# EAGLE board fri3d_badge_2016 (EAGLE 7.5.0)
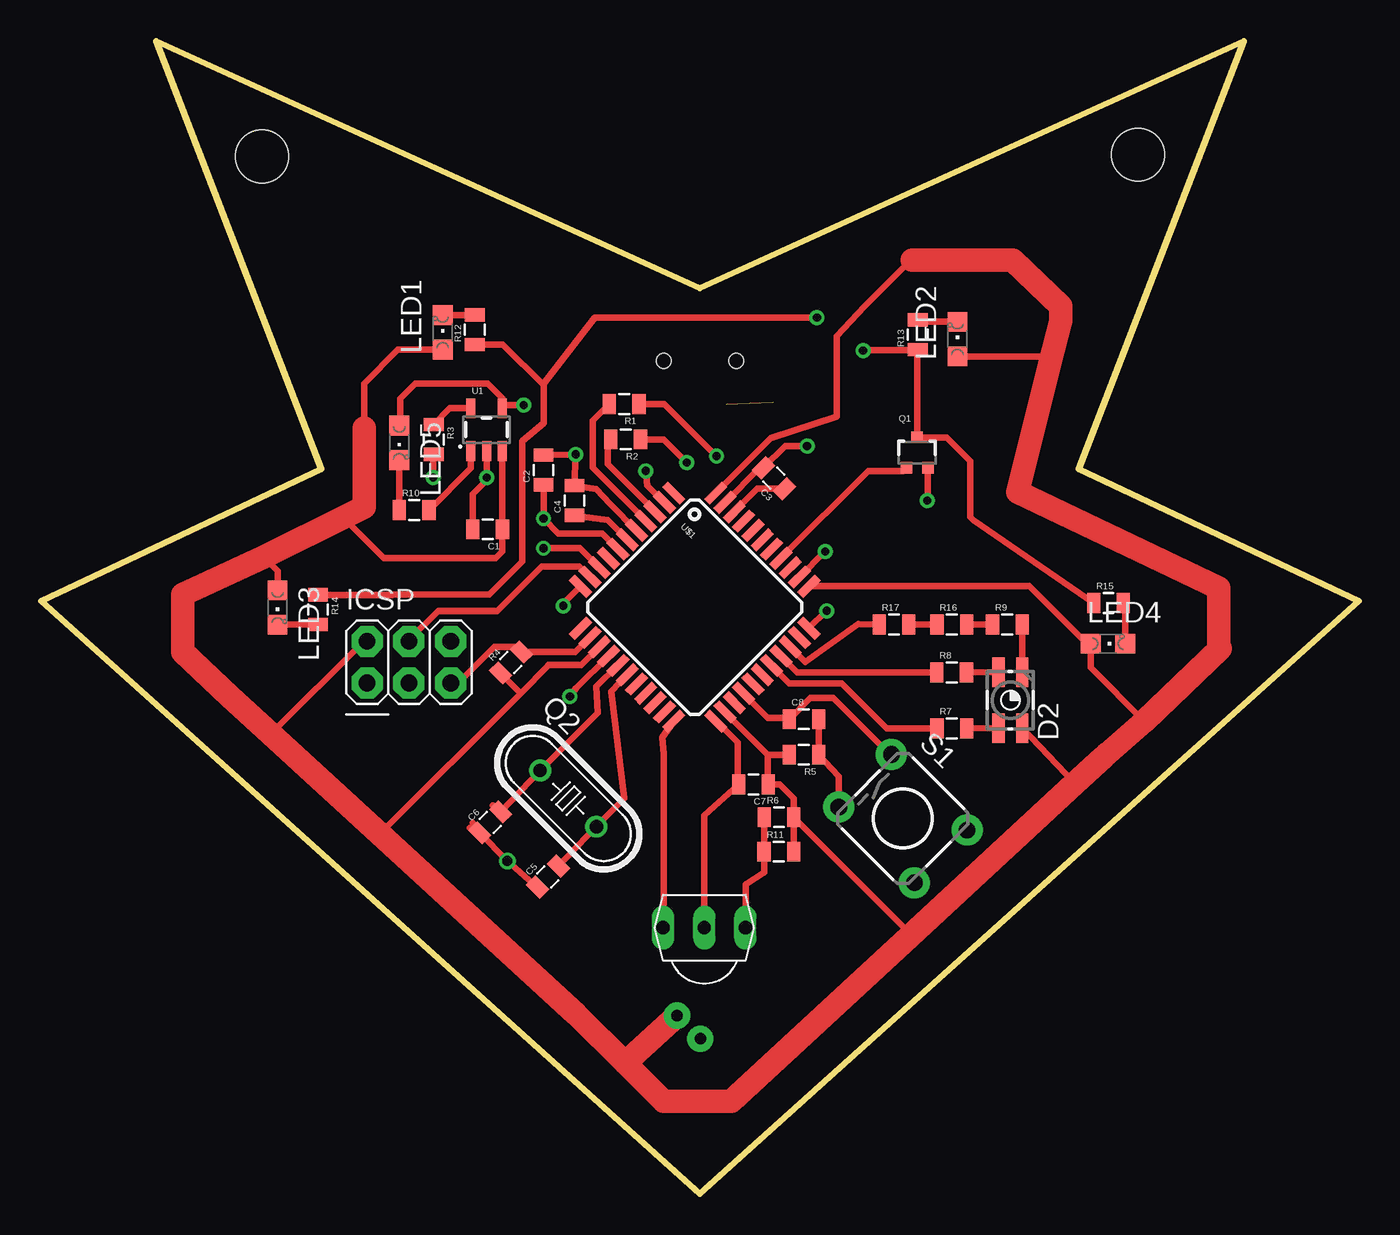
[diagram p0: board, top side]
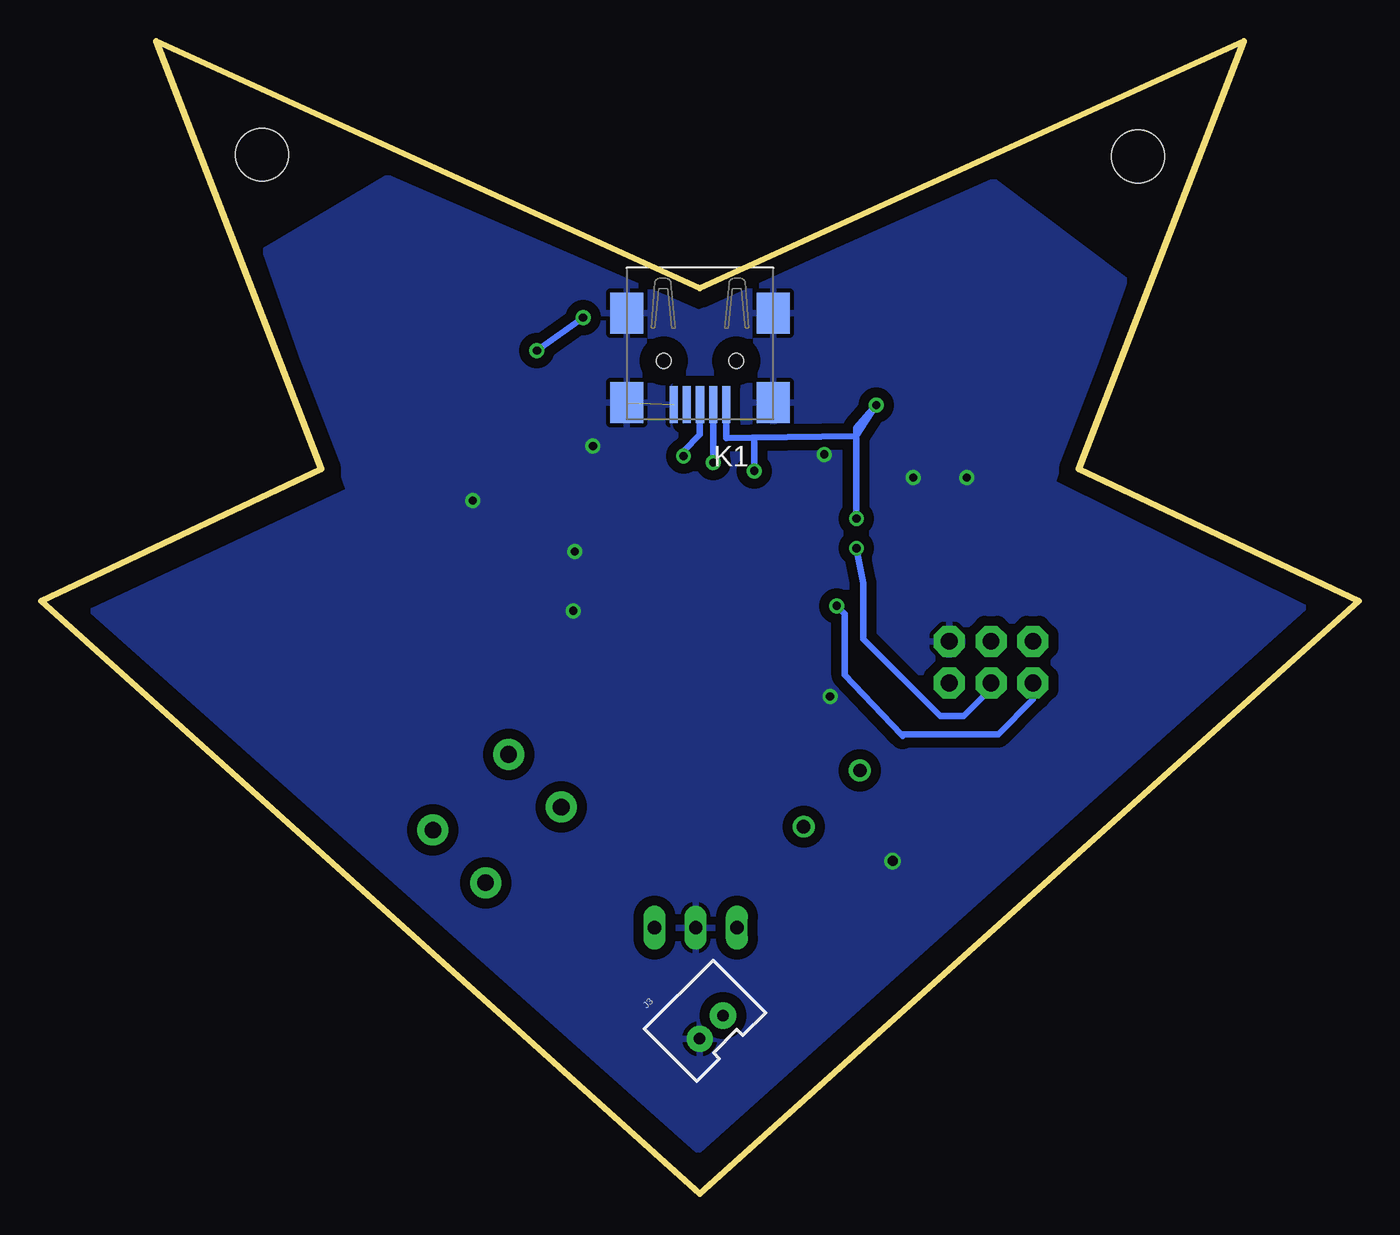
[diagram p1: board, bottom side, seen from below]

Size 80 x 70 mm. Coordinates in mm from the lower left corner, seen from the top.
Outline: 7,70 17,44 0,36 40,0 80,36 63,44 73,70 40,55 7,70
Copper layers (1*16): Top 0.035mm / dielectric 1.5mm / Bottom 0.035mm
Design rules "default": minimum track width 10mil, minimum drill 24mil, track to track 8mil, track to pad 8mil, pad to pad 8mil, via to via 8mil, smd to smd 8mil, copper to edge 40mil, drill to drill 8mil, minimum pad ring 10mil, minimum via ring 8mil, stop-mask expansion 4mil, vias tented up to drill 0mil, thermal gap 10mil
Holes 3.2 mm at 13.4,63 66.6,63.1

## Footprints (pad centres in the part's own frame; a part is rotated, then mirrored left to right if it is on the bottom)
0805 = smd 0.8 x 1.2: 1 -0.9,0; 2 0.9,0
P-LCC-4-3 = smd 0.75 x 1.8: 1 0.725,1.7; 2 -0.725,1.7; 3 -0.725,-1.7; 4 0.725,-1.7
2X03 = drill 1.016 pad 1.88 octagon: 1 -2.54,-1.27; 2 -2.54,1.27; 3 0,-1.27; 4 0,1.27; 5 2.54,-1.27; 6 2.54,1.27
JST-2-PTH-VERT = drill 0.7 pad 1.6: 1 -1,-0.55; 2 1,-0.55
65100516121 = smd 0.5 x 2.25: 1 -1.6,5.685; 2 -0.8,5.685; 3 0,5.685; 4 0.8,5.685; 5 1.6,5.685 | smd 2 x 2.5: Z1 -4.45,5.56; Z2 4.45,5.56; Z3 4.45,0.11; Z4 -4.45,0.11 | hole 0.9: -2.2,3.01; 2.2,3.01
CHIPLED_0805 = smd 1.2 x 1.2: A 0,-1.05; C 0,1.05
SOT323 = smd 0.7 x 0.7: 1 -0.65,-0.925; 2 0.65,-0.925; 3 0,0.925
HC49/S = drill 0.813: 1 -2.413,0; 2 2.413,0
TACTILE-PTH = drill 1.016 pad 1.88: 1 -3.251,2.261; 2 3.251,2.261; 3 -3.251,-2.261; 4 3.251,-2.261
SOT23-5 = smd 0.55 x 1.2: 1 -0.95,-1.3; 2 0,-1.3; 3 0.95,-1.3; 4 0.95,1.3; 5 -0.95,1.3
TQFP44 = smd 1.5 x 0.5: 1 -5.8,4; 2 -5.8,3.2; 3 -5.8,2.4; 4 -5.8,1.6; 5 -5.8,0.8; 6 -5.8,0; 7 -5.8,-0.8; 8 -5.8,-1.6; 9 -5.8,-2.4; 10 -5.8,-3.2; 11 -5.8,-4; 23 5.8,-4; 24 5.8,-3.2; 25 5.8,-2.4; 26 5.8,-1.6; 27 5.8,-0.8; 28 5.8,0; 29 5.8,0.8; 30 5.8,1.6; 31 5.8,2.4; 32 5.8,3.2; 33 5.8,4 | smd 0.5 x 1.5: 12 -4,-5.8; 13 -3.2,-5.8; 14 -2.4,-5.8; 15 -1.6,-5.8; 16 -0.8,-5.8; 17 0,-5.8; 18 0.8,-5.8; 19 1.6,-5.8; 20 2.4,-5.8; 21 3.2,-5.8; 22 4,-5.8; 34 4,5.8; 35 3.2,5.8; 36 2.4,5.8; 37 1.6,5.8; 38 0.8,5.8; 39 0,5.8; 40 -0.8,5.8; 41 -1.6,5.8; 42 -2.4,5.8; 43 -3.2,5.8; 44 -4,5.8
TSOP18XX = drill 0.813 long: GND -0.001,-0.027; OUT -2.501,-0.027; VCC 2.499,-0.027

## Placement (x,y rotation side)
C1  4.7uF  [0805]  27.11,40.35 180 top
C2  4.7uF  [0805]  30.5,43.95 90 top
C3  0.1uF  [0805]  44.49,43.45 135 top
C4  4.7uF  [0805]  32.38,42.1 90 top
C5  18pF  [0805]  30.77,19.25 45 top
C6  18pF  [0805]  27.26,22.55 45 top
C7  0.1uF  [0805]  43.25,24.85 180 top
C8  0.1uF  [0805]  46.31,28.81 0 top
D2  [P-LCC-4-3]  58.84,29.98 0 top
ICSP  [2X03]  22.33,32.28 0 top
J3  [JST-2-PTH-VERT]  39.7,10.5 45 bottom
K1  65100516121  [65100516121]  40,53.6 180 bottom
LED1  [CHIPLED_0805]  24.38,52.31 0 top
LED2  [CHIPLED_0805]  55.63,51.9 0 top
LED3  [CHIPLED_0805]  14.35,35.6 180 top
LED4  [CHIPLED_0805]  64.77,33.4 270 top
LED5  [CHIPLED_0805]  21.74,45.6 180 top
Q1  MOSFET-NCHANNEL2N7002PW  [SOT323]  53.18,45 0 top
Q2  [HC49/S]  32,24 315 top
R1  22  [0805]  35.4,47.96 180 top
R2  22  [0805]  35.49,45.81 180 top
R3  10K  [0805]  23.83,45.81 270 top
R4  10K  [0805]  28.52,32.26 45 top
R5  220  [0805]  46.31,26.66 180 top
R6  220  [0805]  44.8,22.86 0 top
R7  22  [0805]  55.29,28.26 0 top
R8  22  [0805]  55.28,31.66 0 top
R9  22  [0805]  58.66,34.57 0 top
R10  220  [0805]  22.65,41.52 0 top
R11  220  [0805]  44.79,20.77 0 top
R12  220  [0805]  26.33,52.47 90 top
R13  220  [0805]  53.22,52.17 90 top
R14  220  [0805]  16.81,35.47 270 top
R15  220  [0805]  64.8,35.87 0 top
R16  22  [0805]  55.29,34.57 0 top
R17  22  [0805]  51.78,34.57 0 top
S1  SWITCH-MOMENTARY-2PTH  [TACTILE-PTH]  52.32,22.78 315 top
U1  MCP73831  [SOT23-5]  27.04,46.4 0 top
U$1  ATMEGA32U4TQFP-44  [TQFP44]  39.68,35.62 315 top
U$3  TSOP4838  [TSOP18XX]  40.26,16.18 0 top

## Library data of the parts
C1-C8 = SparkFun-Capacitors
D2 = SparkFun-LED; PROD_ID: DIO-12986
ICSP J3 = SparkFun-Connectors
K1 = Input-Output_Connectors_rev15d
LED1-LED4 = led
LED5 = adafruit
Q1 = SparkFun-DiscreteSemi; PROD_ID: TRANS-11151
Q2 = crystal; OC_FARNELL: 1667008; OC_NEWARK: unknown
R1-R17 = SparkFun-Passives
S1 = SparkFun-Electromechanical; PROD_ID: SWCH-08441
U1 = SparkFun-PowerIC; PROD_ID: IC-09995
U$1 = SparkFun-DigitalIC
U$3 = tsop

## Nets
BUTTON: C8.1 S1.1 U$1.26
D+: R1.2 U$1.4
D-: R2.2 U$1.3
GND: C1.2 C2.2 C3.2 C4.2 C5.1 C6.1 C7.2 ICSP.6 J3.1 K1.5 K1.Z1 K1.Z2 K1.Z3 K1.Z4 Q1.2 R3.2 U1.2 U$1.5 U$1.15 U$1.23 U$1.33 U$1.35 U$1.43 U$3.GND
IR_RX: U$1.22 U$3.OUT
IR_TX: Q1.1 U$1.37
MISO: ICSP.1 U$1.11
MOSI: ICSP.4 U$1.10
N$1: K1.2 R2.1
N$2: K1.3 R1.1
N$3: C8.2 R5.1 S1.3
N$4: C4.1 U$1.6
N$5: R3.1 U1.5
N$6: LED5.C R10.1
N$7: C3.1 U$1.42
N$8: C5.2 Q2.2 U$1.17
N$9: C6.2 Q2.1 U$1.16
N$10: R6.1 R11.1 U$3.VCC
N$11: R9.1 R16.2
N$12: R16.1 R17.2
N$13: LED1.C R12.2
N$14: LED2.C R13.2
N$15: LED3.C R14.2
N$16: LED4.C R15.2
N$19: D2.3 R7.2
N$20: D2.2 R8.2
N$21: D2.1 R9.2
N$22: R10.2 U1.1
N$24: Q1.3 R12.1 R13.1 R14.1 R15.1
RGB_BLUE: R7.1 U$1.29
RGB_GREEN: R8.1 U$1.30
RGB_RED: R17.1 U$1.31
RST: ICSP.5 R4.2 U$1.13
SCK: ICSP.3 U$1.9
USBVCC: C2.1 K1.1 LED5.A U1.4 U$1.2 U$1.7
VCC: C1.1 C7.1 D2.4 ICSP.2 J3.2 LED1.A LED2.A LED3.A LED4.A R4.1 R5.2 R6.2 R11.2 U1.3 U$1.14 U$1.24 U$1.34 U$1.44

## Tracks (layer width: path | path; a pad name or v marks a point on that pad's centre or on a via)
BUTTON
  Top 0.406: U$1.26 42.65,30.35 44.1,28.9 45.32,28.9 C8.1 46.7,30.1 48.1,30.1 51.52,26.68 S1.1
D+
  Top 0.406: 36.65,40.85 U$1.4 36.71,40.89 33.5,44.1 33.5,46.96 R1.2
D-
  Top 0.406: U$1.3 34.4,44.3 34.4,45.62 R2.2
GND  (via drill 0.5, 0.6)  (1 unrouted)
  Top 0.406: U$1.43 43.62,44.09 C3.2 45.17,45.4 v46.5,45.4 | U$1.35 47.59,39 v47.6,39 | U$1.5 34.55,41.89 33.7,42.8 C4.2 v32.45,44.9 C2.2 | R3.2 23.8,44.88 v23.8,43.5 | U1.2 v27.05,43.5 27.05,43.35 26.2,42.5 C1.2 | C1.2 | 26.16,40.3 C1.2 | C6.1 26.21,22.51 | C6.1 26.31,22.21 26.01,22.21 | Q1.2 53.83,42.13 v53.8,42.1 | U$1.15 32.5,30.7 v32.1,30.2 | U$3.GND 40.26,22.96 C7.2 42.3,24.9 42.3,27.4 41.01,28.69 U$1.23 | U$1.33 47.66,35.4 v47.7,35.4 | C5.1 v28.3,20.2 C6.1
  pour Bottom (isolate 0.61): 3.3,35.6 18.6,43.2 14.2,55.5 22.2,61.5 40.1,53.5 59,61.7 66.4,57.3 61.3,42.7 76.9,35.4 40.1,2.6
IR_RX
  Top 0.406: U$3.OUT 37.8,18.8 37.8,26.7 37.71,27.7 U$1.22
IR_TX
  Top 0.406: Q1.1 52.35,43.9 50.2,43.9 44.91,38.61 U$1.37
MISO  (via drill 0.5)
  Top 0.406: v31.7,35.7 31.7,35.84 U$1.11
  Bottom 0.406: ICSP.1 19.79,30.01 21.9,27.9 27.79,27.9 | 27.7,27.8 27.79,27.9 | 27.79,27.9 31.2,31.5 31.2,35.2 v31.7,35.7
MOSI
  Top 0.406: ICSP.4 22.33,33.63 24.1,35.4 27.7,35.4 30.4,38.1 32.67,38.1 U$1.10
N$1  (via drill 0.5)
  Top 0.406: R2.1 37.79,45.81 v39.2,44.4
  Bottom 0.406: v39.2,44.4 K1.2
N$2  (via drill 0.5)
  Top 0.406: R1.1 37.84,47.96 v41,44.8
  Bottom 0.406: v41,44.8 41,45.1 40,46.1 K1.3
N$3
  Top 0.406: S1.3 48.42,25.35 R5.1 C8.2
N$4
  Top 0.406: U$1.6 34.39,40.91 C4.1
N$5
  Top 0.406: R3.1 24.82,47.7 U1.5
N$6
  Top 0.406: R10.1 LED5.C
N$7
  Top 0.406: U$1.42 43.48,42.81 C3.1
N$8
  Top 0.406: C5.2 Q2.2 35.4,24 34.6,30.5 U$1.17
N$9
  Top 0.406: 34.98,32.08 U$1.16 33.7,30.8 33.8,29.2 Q2.1 C6.2 27.41,23.59
N$10
  Top 0.406: U$3.VCC 42.77,18.77 43.9,19.5 R11.1 R6.1
N$11
  Top 0.406: R16.2 R9.1
N$12
  Top 0.406: R17.2 R16.1
N$13
  Top 0.406: LED1.C R12.2
N$14
  Top 0.406: LED2.C 53.34,52.95 R13.2
N$15
  Top 0.406: R14.2 14.37,34.57 LED3.C
N$16
  Top 0.406: LED4.C 65.82,35.75 R15.2
N$19
  Top 0.406: R7.2 D2.3
N$20
  Top 0.406: R8.2 D2.2
N$21
  Top 0.406: R9.2 D2.1
N$22
  Top 0.406: R10.2 26.09,44.06 U1.1
N$24  (via drill 0.5)
  Top 0.406: R14.1 21.31,36.37 21.34,36.4 27.2,36.4 29.2,38.4 29.2,45.7 30.5,46.8 30.5,49.1 | Q1.3 54.98,45.92 56.4,44.5 56.4,41.1 56.6,40.9 R15.1 | 30.5,49.1 28.03,51.57 R12.1 | Q1.3 53.18,51.23 | 53.18,51.23 R13.1 | Q1.3 53.18,47.22 | v47.1,53.2 33.6,53.2 30.5,49.2 30.5,49.1 | 53.18,51.23 50.13,51.23 v49.9,51.2
  Bottom 0.406: v49.9,51.2 v47.1,53.2
RGB_BLUE
  Top 0.406: R7.1 51.34,28.26 48.6,31 45.43,31 U$1.29
RGB_GREEN
  Top 0.406: R8.1 45.9,31.66 U$1.30
RGB_RED
  Top 0.406: R17.1 49.6,34.6 46.39,32.3 U$1.31
RST
  Top 0.406: U$1.13 32.43,32.9 R4.2 28.85,33.2 27.5,33.2 25.31,31.01 ICSP.5
SCK  (via drill 0.5)
  Top 0.406: v30.5,39.2 32.71,39.2 U$1.9
  Bottom 0.406: ICSP.3 22.33,30.67 24,29 25.4,29 30.1,33.7 30.1,37.1 v30.5,39.2
USBVCC  (via drill 0.5)
  Top 0.406: LED5.A 21.8,46.71 21.8,48.3 22.7,49.2 27.1,49.2 27.99,48.31 U1.4 28.19,47.9 v29.3,47.9 | U$1.7 34.07,40.1 31.4,40.1 v30.5,41 C2.1 | U$1.2 36.8,43 v36.7,43.9
  Bottom 0.406: v30.5,41 30.5,46 | 30.5,46 30.5,46.5 v29.3,47.9 30.5,46 | K1.1 38.4,45.9 36.8,45.92 | 36.8,45.92 30.5,46 | v36.7,43.9 36.7,45.82 36.8,45.92
VCC
  Top 0.406: C1.1 28.1,40.26 | U1.3 27.99,40.37 C1.1 | 18.76,41.24 18.76,41.28 | 11.44,30.24 11.44,30.2 | C1.1 28,39 27.6,38.6 20.8,38.6 18.7,40.7 19.6,41.6 19.6,42 | LED3.A 14.35,37.83 13.52,38.66 | 19.6,46.5 19.6,49.2 21.65,51.25 24.07,51.25 LED1.A | U$1.14 33.88,33.18 32.8,32.1 30.8,32.1 30.8,32.07 29.11,30.39 | 29.11,30.39 20.57,21.84 | R4.1 29.11,30.39 | ICSP.2 19.58,33.55 13.94,27.91 | LED2.A 60.81,50.85 61.25,50.41 | 66.97,28.69 63.72,31.94 LED4.A 63.5,33.4 60,36.9 U$1.34 | D2.4 62.76,24.91 | R6.2 52.74,15.82 52.74,15.63 | R11.2 R6.2 | U$1.24 41.58,29.2 | 41.58,29.2 41.6,29.2 | U$1.44 44.3,45.9 48.3,47.2 48.3,52.1 50,53.9 52.8,56.7 52.9,56.7 | 45.41,26.31 R5.2 44.12,26.66 | 41.58,29.2 44.12,26.66 | R6.2 45.7,24 44.85,24.85 C7.1 44.12,25.32 44.12,26.66
  Top 1.422: 19.6,46.5 19.6,42 19.6,41.7 18.76,41.28 13.52,38.66 8.6,36.4 8.6,32.9 11.44,30.2 13.94,27.91 20.57,21.84 32.5,10.9 35.45,7.95 | 64.7,26.7 64.53,26.54 | 64.53,26.54 62.76,24.91 52.74,15.63 41.9,5.6 37.8,5.6 35.45,7.95 | 64.53,26.54 66.97,28.69 71.6,33.1 71.5,33.2 71.5,36.8 59.3,42.6 61.25,50.41 61.9,53 61.9,53.9 59,56.7 52.9,56.7 | J3.2 35.45,7.95